# Altium PCB Yitran_IT900_Hutschiene_PIM7A_908_1_4_und_Adapter.PcbDoc
Units mil, origin at the board's own origin, x right, y up, seen from the top; angles counter-clockwise.
Board outline 3745 x 1445 mil, 2 copper layers (Top, Bottom), stack 61.811 mil thick; 33 components, 37 nets, 284 pads, 15 vias.
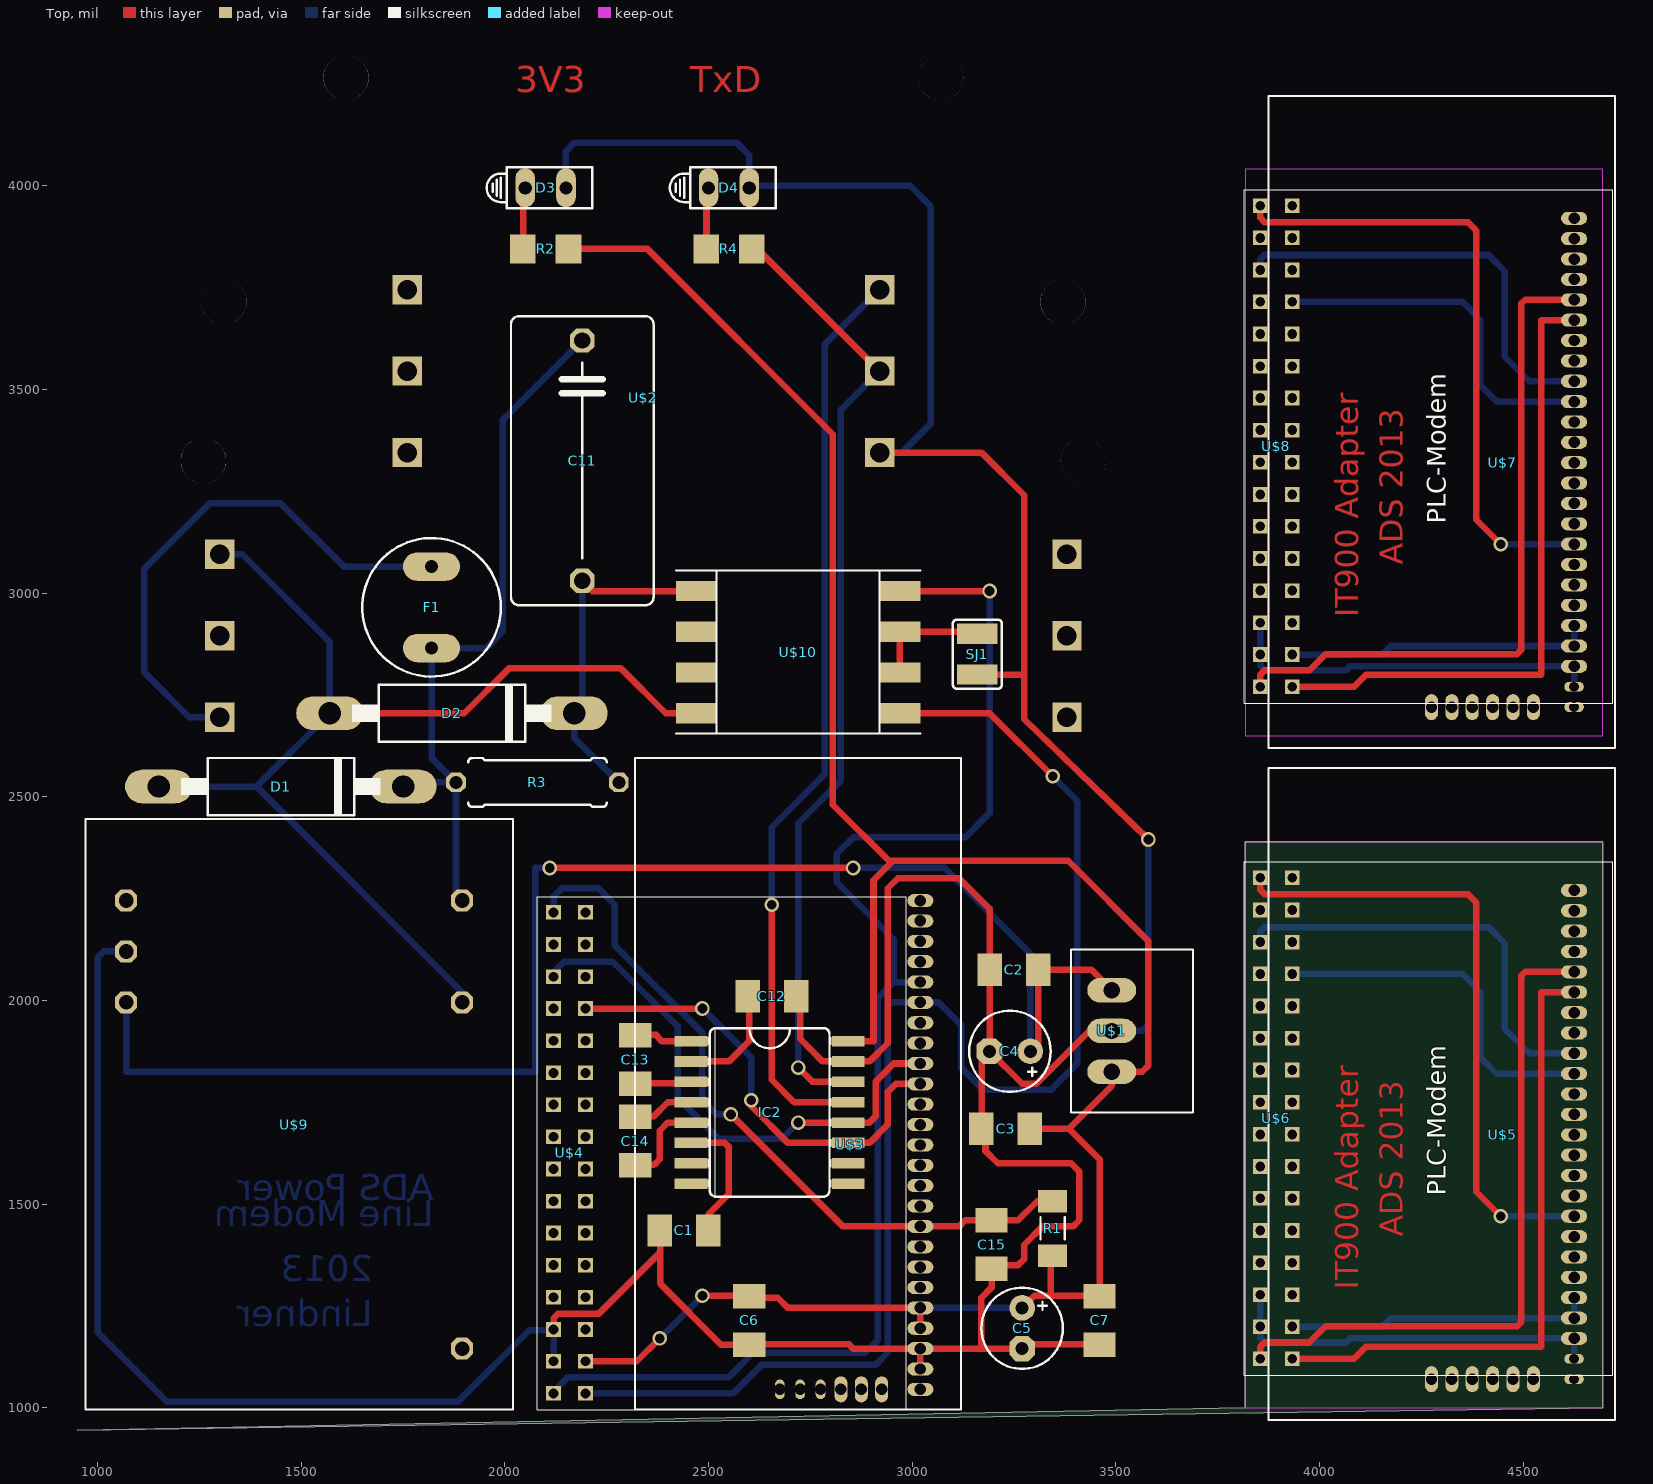
[diagram p0: Top view]
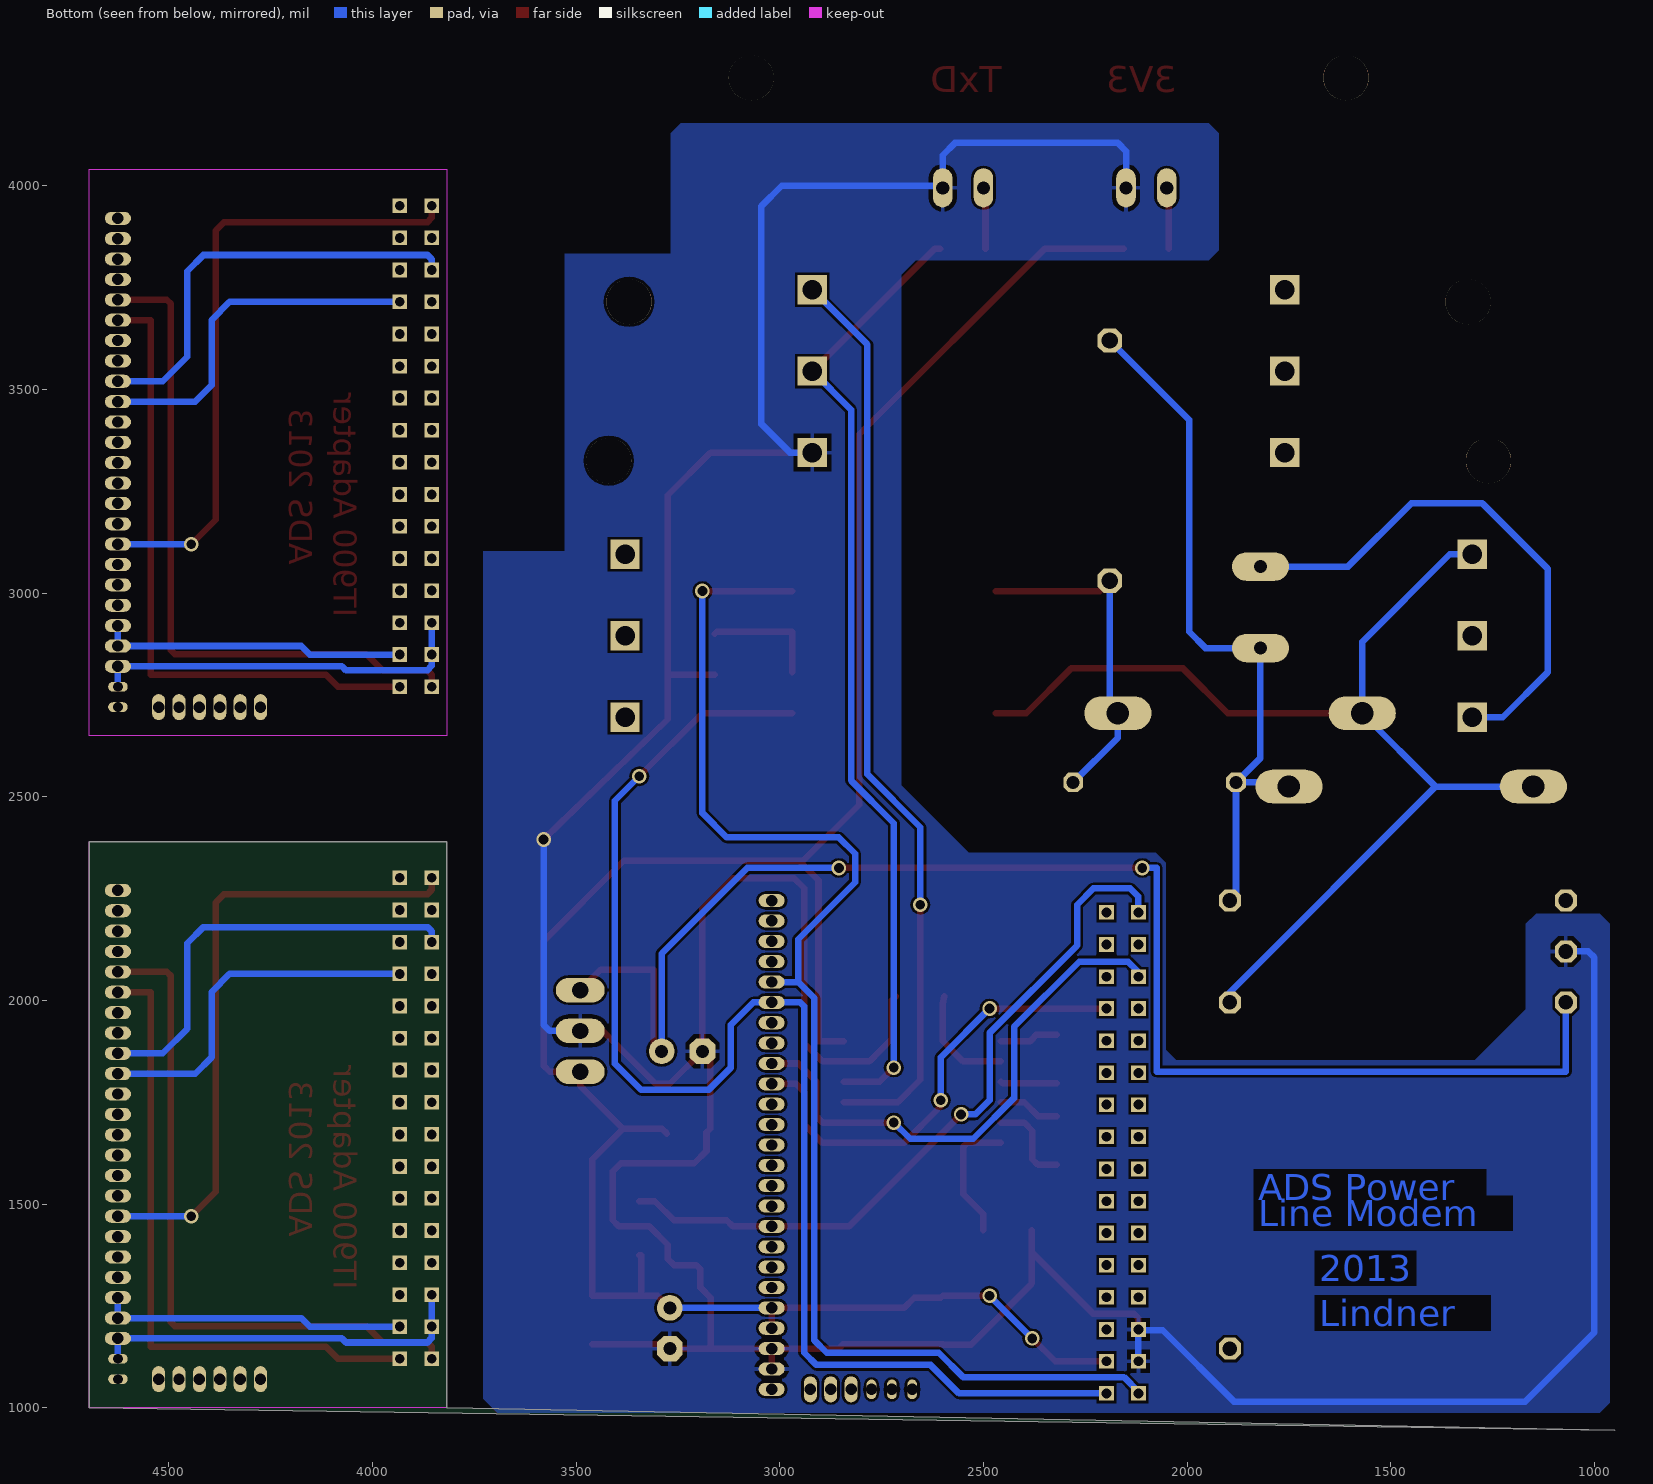
[diagram p1: Bottom view, seen from below]

## Layer stack, top to bottom
Top Solder: solder mask 0.4, Solder Resist, Dk 3.5
Top: signal copper 1.378
Dielectric 1: core 59.0551, FR-4, Dk 4.8
Bottom: signal copper 1.378
Bottom Solder: solder mask 0.4, Solder Resist, Dk 3.5

## Board outline
4695,1000 4695,2390 3818,2390 3818,1000 950,945
cut-out: 4695,2650 4695,4040 3818,4040 3818,2650

## Design rules (kind name [scope] priority, off if disabled: settings)
Clearance mdViaVia [IsVia vs IsVia] p1: gap=5.91
Clearance mdPadVia [IsPad vs IsVia] p2: gap=5.91
Clearance mdPadPad [IsPad vs IsPad] p3: gap=5.91
Clearance mdWireVia [(InLayerClass('Signal Layers') AND IsTrack) vs IsVia] p4: gap=5.91
Clearance mdWirePad [(InLayerClass('Signal Layers') AND IsTrack) vs IsPad] p5: gap=5.91
Clearance mdWireWire [(InLayerClass('Signal Layers') AND IsTrack) vs (InLayerClass('Signal Layers') AND IsTrack)] p6: gap=5.91
Clearance [All] p7: gap=5.91
HoleSize [All] p1: absolutevalues=TRUE maxlimit=100000 minlimit=11.81 maxpercent=80.000 minpercent=20.000
HoleToHoleClearance [All] p1: gap=7.87 allowstackedmicrovias=TRUE
PolygonConnect ThermalVias [IsVia] p1: connectstyle=Direct reliefconductorwidth=10 reliefentries=4 polygonreliefangle="90 Angle" airgapwidth=10
PolygonConnect [All] p2: connectstyle=Relief reliefconductorwidth=10 reliefentries=4 polygonreliefangle="90 Angle" airgapwidth=10
RoutingVias [All] p1: holewidth=28 width=50 viastyle="Through Hole" minholewidth=28 minwidth=50 maxholewidth=28 maxwidth=50
SilkToSilkClearance [All] p1 off: silktosilkclearance=10
SilkToSolderMaskClearance [IsPad] p1 off: minsilkscreentomaskgap=10 clearancetoexposedcopper=TRUE
SolderMaskExpansion [All] p1: expansion=2.95
Width [All] p1: maxlimit=100000 minlimit=5.91 preferedwidth=10
26 further rules are at their usual default settings.

## Components (designator, comment, footprint, x,y, rotation, side; value= is the part's Value field where it differs from the comment)
C1 "100n" C1206K 2440,1435 r180 top
C2 "100n" C1206K 3250,2075 r180 top
C3 "100n" C1206K 3230,1685 r180 top
C4 "4µ7" E2,5-5 3240,1875 r180 top
C5 "4µ7" E2,5-5 3270,1195 r270 top
C6 "100n" C1206K 2600,1215 r270 top
C7 "100n" C1206K 3460,1215 r270 top
C11 "" C150-091X182 2190,3325 r270 top
C12 "" C1206K 2655,2010 r0 top
C13 "100n" C1206K 2320,1855 r270 top
C14 "100n" C1206K 2320,1655 r270 top
C15 "100n" C1206K 3195,1400 r90 top
D1 "" CB417-15 1450,2525 r180 top
D2 "" CB417-15 1870,2705 r180 top
D3 "Power_3,3V rot" HLMP6 2100,3995 r0 top
D4 "TxD gruen" HLMP6 2550,3995 r0 top
F1 "1A" TR5 1820,2965 r270 top
IC2 "" SO16L 2650,1725 r270 top
R1 "100k" M1406 3345,1440 r270 top
R2 "330R" R1206 2100,3845 r0 top
R3 "470k" 0309/10 2080,2535 r0 top
R4 "330R" R1206 2550,3845 r0 top
SJ1 "" SJW 3160,2850 r270 top
U$1 "" RECOM785X 3390,1925 r270 top
U$2 "" LDG-A-12 2340,4445 r0 top
U$3 "" MODEM_FUSS 2670,1845 r90 top
U$4 "" IT900PIM7A 2080,995 r90 top
U$5 "" MODEM_FUSS_KLEINE_PINS 4225,1720 r90 top
U$6 "" IT900PIM7A 3815,1080 r90 top
U$7 "" MODEM_FUSS_KLEINE_PINS 4225,3370 r90 top
U$8 "" IT900PIM7A 3815,2730 r90 top
U$9 "" RAC04_12SA 2020,995 r90 top
U$10 "" PLC-UEBERTRAGER_V2 2720,2855 r0 top

## Footprints (in the part's own frame and the unit in brackets; to place one, negate y for a bottom-side part, rotate by r counter-clockwise, add the part's x,y. Pads: shape width x height; smd on the part's side, far side on the other; paste and mask are expansions set on the pad)
0309/10 [mil] "0309/10"
  oct 48x48 hole 32: 1(-200,0) 2(200,0)
  silkscreen extent -170,-60 170,60
C150-091X182 [mil] "C150-091X182"
  oct 60x60 hole 40: 1(-295,0) 2(295,0)
  silkscreen extent -355,-175 355,175
C1206K [mil] "C1206K"
  rect 60x79 smd: 1(-59.06,0) 2(60,0)
CB417-15 [mil] "CB417-15"
  oval 165x82.5 hole 55: A(300,0) C(-300,0)
  silkscreen extent -245,-70 245,70
E2,5-5 [mil] "E2,5-5"
  round 63 hole 32: +(-50,0)
  oct 63x63 hole 32: -(50,0)
  silkscreen extent -100,-100 100,100
HLMP6 [mil] "HLMP6"
  oval 48x96 hole 32: A(-50,0) K(50,0)
  silkscreen extent -145,-50 115,50
IT900PIM7A [mil] "IT900PIM7A"
  rect 36x36 hole 24: 1_LINE_N(40,-118.11) 2_LINE_P(40,-39.37) 3_+3_3V(119,-118.11) 4_GND(119,-39.37) 6_GND(197,-39.37) 25_TXD(985,-118.11) 28_RXD(1063,-39.37) 32_EXTRST(1221,-39.37) P$5(197,-118.11) P$7(276,-118.11) P$8(276,-39.37) P$9(355,-118.11) P$10(355,-39.37) P$11(434,-118.11) P$12(434,-39.37) P$13(512,-118.11) P$14(512,-39.37) P$15(591,-118.11) P$16(591,-39.37) P$17(670,-118.11) P$18(670,-39.37) P$19(749,-118.11) P$20(749,-39.37) P$21(827,-118.11) P$22(827,-39.37) P$23(906,-118.11) P$24(906,-39.37) P$26(985,-39.37) P$27(1063,-118.11) P$29(1142,-118.11) P$30(1142,-39.37) P$31(1221,-118.11)
  silkscreen extent 0,-906 1260,0
LDG-A-12 [mil] "LDG-A-12"
  round 111 hole 111: 1(-1080,-1120) 1(-1030,-730) 1(-730,-180) 1(730,-180) 1(1030,-730) 1(1080,-1120)
  rect 72x72 hole 48: P$1(-1040,-1750) P$2(-1040,-1550) P$3(-1040,-1350) P$4(-580,-1100) P$5(-580,-900) P$6(-580,-700) P$7(1040,-1750) P$8(1040,-1550) P$9(1040,-1350) P$10(580,-1100) P$11(580,-900) P$12(580,-700)
M1406 [mil] "M1406"
  rect 56x71 smd: 1(-66.93,0) 2(67,0)
  silkscreen extent -27,-30 27,30
MODEM_FUSS [mil] "MODEM_FUSS"
  oval 32x64 hole 28: P$1(-800,-350) P$2(-750,-350) P$3(-700,-350) P$4(-650,-350) P$5(-600,-350) P$6(-550,-350) P$7(-500,-350) P$8(-450,-350) P$9(-400,-350) P$10(-350,-350) P$11(-300,-350) P$12(-250,-350) P$13(-200,-350) P$14(-150,-350) P$15(-100,-350) P$16(-50,-350) P$17(0,-350) P$18(50,-350) P$19(100,-350) P$20(150,-350) P$21(200,-350) P$22(250,-350) P$23(300,-350) P$24(350,-350) P$25(400,-350)
  oval 48x24 hole 28: P$26(-800,-5) P$27(-800,-55) P$28(-800,-105)
  oval 64x32 hole 28: P$29(-800,-155) P$30(-800,-205) P$31(-800,-255)
  silkscreen extent -850,-450 750,350
MODEM_FUSS_KLEINE_PINS [mil] "MODEM_FUSS_KLEINE_PINS"
  oval 32x64 hole 28: 3V3(-450,-400) 3V3AN(-500,-400) 5V(550,-400) GND(-550,-400) LINE1(300,-400) LINE2(350,-400) NRESET(-250,-400) P$6(-400,-400) P$7(-350,-400) P$8(-300,-400) P$10(-200,-400) P$11(-150,-400) P$12(-100,-400) P$13(-50,-400) P$14(0,-400) P$15(50,-400) P$18(200,-400) P$19(250,-400) P$22(400,-400) P$23(450,-400) P$24(500,-400) RXD(150,-400) TXD(100,-400)
  oval 24x48 hole 24: AGND(-600,-400) P$1(-650,-400)
  oval 64x32 hole 28: P$26(-650,-300) P$27(-650,-250) P$28(-650,-200) P$29(-650,-150) P$30(-650,-100) P$31(-650,-50)
  silkscreen extent -750,-500 850,350
PLC-UEBERTRAGER_V2 [mil] "PLC-UEBERTRAGER_V2"
  rect 100x50 smd: 1LINE1(250,150) 2(250,50) 3(250,-50) 4LINE2(250,-150) 6NC(-250,50) 7NC(-250,-50) 8N(-250,-150) L5(-250,150)
  silkscreen extent -300,-200 300,200
R1206 [mil] "R1206"
  rect 63x71 smd: 1(-55.98,0) 2(56,0)
RAC04_12SA [mil] "RAC04_12SA"
  oct 54x54 hole 36: +VO(1000,950) GND(1125,950) L(1250,125) N(1000,125) NC(150,125) NC1(1250,950)
  silkscreen extent 0,0 1450,1050
RECOM785X [mil] "RECOM785X"
  oval 60x120 hole 40: GND(0,100) VIN(-100,100) VOUT(100,100)
  silkscreen extent -200,0 200,300
SJW [mil] "SJW"
  rect 50x100 smd: 1(-50,0) 2(50,0)
  silkscreen extent -85,-60 85,60
SO16L [mil] "SO16L"
  rect 26x80 smd: 1(-175,-193) 2(-125,-193) 3(-75,-193) 4(-25,-193) 5(25,-193) 6(75,-193) 7(125,-193) 8(175,-193) 9(175,193) 10(125,193) 11(75,193) 12(25,193) 13(-25,193) 14(-75,193) 15(-125,193) 16(-175,193)
  silkscreen extent -207,-152 207,152
TR5 [mil] "TR5"
  oval 70x140 hole 32: 1(-100,0) 2(100,0)
  silkscreen extent -170,-170 170,170

## Part data
C1 C2 C3 C6 C7 C12 C13 C14 C15: library part C1206K
C4 C5: library part E2,5-5
C11: library part C150-091X182
D1 D2: library part CB417-15
D3 D4: library part HLMP6
F1: library part TR5
IC2: library part SO16L
R1: library part M1406
R2 R4: library part R1206
R3: library part 0309/10
SJ1: library part SJW
U$1: library part RECOM785X
U$2: library part LDG-A-12
U$3: library part MODEM_FUSS
U$4 U$6 U$8: library part IT900PIM7A
U$5 U$7: library part MODEM_FUSS_KLEINE_PINS
U$9: library part RAC04_12SA
U$10: library part PLC-UEBERTRAGER_V2

## Via types
v1: diameter 35.81/35.81 (per signal layer), hole 24, Top to Bottom, 15 vias

## Nets (pads, with @x,y where several pads share a name; then routed paths per layer and width w, separated by ;. In a path a pad name is that pad's centre, name@x,y a point inside that pad or via, vN(x,y) a via of type N, cw(c..) or ccw(c..) an arc to the next point about the centre after c; other vN are vias at no path point)
3V3: C3.1 C5.+ C6.1 C7.1 IC2.16 R1.2 R2.2 U$1.VOUT U$3.P$4 U$3.P$5 U$4.3_+3_3V | length 5831.1
  Top w16: R2.2 2350,3845 2805,3390 2805,2480 2943,2343 2953,2343 ; U$4.3_+3_3V@2199,1114 2324,1114 v1(2380,1170) ; v1(2485,1275) 2600,1275 2605,1270 2670,1270 2695,1245 U$3.P$5 U$3.P$4 ; IC2.16 2905,1900 2905,2295 2953,2343 ; C5.+ 3300,1275 3340,1275 ; C3.1@3277,1673 3290,1685 3385,1685 ; R1.2@3345,1374 3340,1374 3340,1275 ; 2953,2343 3383,2343 3580,2145 3580,1840 3565,1825 U$1.VOUT 3490,1790 3385,1685 ; 3340,1275 3460,1275 3460,1610 3385,1685
  Bottom w16: v1(2380,1170) v1(2485,1275) ; U$3.P$5 C5.+
EXTRST: C15.2 R1.1 U$3.P$9 U$4.32_EXTRST | length 1797
  Top w16: v1(2555,1720) 2830,1445 U$3.P$9 3115,1445 3130,1460 C15.2 3196,1460 3260,1460 3307,1507 R1.1@3345,1507
  Bottom w16: U$4.32_EXTRST@2120,2216 2120,2217 2120,2255 2140,2275 2230,2275 2270,2235 2270,2135 2485,1920 2485,1755 2520,1720 v1(2555,1720)
GND: C1.2 C2.2 C3.2 C4.- C5.- C6.2 C7.2 C12.2 C15.1 D3.K D4.K IC2.15 SJ1.2 U$1.GND U$2.P$10 U$3.P$2 U$3.P$3 U$4.4_GND U$4.6_GND U$9.GND | length 10825.8
  Top w16: U$4.6_GND@2120,1192 2120,1193 2120,1220 2130,1230 2230,1230 2381,1381 2381,1435 2381,1305 2530,1155 C6.2 2600,1156 2845,1156 2855,1145 U$3.P$3 ; C12.2 2725,2000 2725,1906 2780,1850 IC2.15 2895,1850 2940,1895 2940,2275 2965,2300 3115,2300 3190,2225 3190,2076 3191,2075 3191,1876 C4.- ; U$2.P$10 3170,3345 3275,3240 3275,2800 ; U$3.P$2 U$3.P$3 ; SJ1.2@3175,2800 SJ1.2 3275,2800 ; C7.2@3460,1156 3281,1156 C5.- 3175,1145 ; U$1.GND 3435,1925 3305,1795 3270,1795 C4.- ; v1(3580,2395) 3275,2690 3275,2800 ; U$3.P$3 3175,1145 ; 3175,1145 3170,1150 3170,1270 3195,1295 3195,1341 3205,1350 3260,1350 3275,1365 3275,1400 3320,1445 3395,1445 3410,1460 3410,1580 3390,1600 3210,1600 3180,1630 3180,1676 3171,1685 3171,1856 C4.-
  Bottom w16: U$9.GND 1015,2120 1000,2105 1000,1185 1170,1015 1885,1015 2060,1190 2118,1190 2120,1192 U$4.4_GND@2120,1114 ; D3.K 2150,4085 2170,4105 2570,4105 2600,4075 D4.K 2605,4000 2995,4000 3045,3950 3045,3415 2975,3345 U$2.P$10 ; U$1.GND 3565,1925 3580,1940 v1(3580,2395)
L: C11.1 D1.C F1.2 R3.1 U$9.L | length 1772.5
  Bottom w16: D1.C 1760,2535 R3.1 ; U$9.L 1880,2260 R3.1 ; C11.1 1995,3425 1995,2905 1955,2865 F1.2 1820,2595 R3.1
LINE1: U$3.P$20 U$4.1_LINE_N U$10.4LINE2 | length 3448.1
  Top w16: U$10.4LINE2 3190,2705 v1(3345,2550)
  Bottom w16: U$4.1_LINE_N@2199,1035 2560,1035 2630,1105 2910,1105 2940,1135 2940,1985 2950,1995 U$3.P$20 3065,1995 3120,1940 3120,1835 3175,1780 3340,1780 3405,1845 3405,2490 v1(3345,2550)
LINE2: U$3.P$21 U$4.2_LINE_P U$10.1LINE1 | length 3367.8
  Top w16: U$10.1LINE1 v1(3190,3005)
  Bottom w16: U$4.2_LINE_P@2120,1035 2120,1040 2155,1075 2550,1075 2610,1135 2885,1135 2915,1165 2915,2005 2955,2045 ; U$3.P$21 2955,2045 ; v1(3190,3005) 3190,2460 3130,2400 2855,2400 2815,2360 2815,2290 2955,2150 2955,2045
N: D1.A D2.A U$2.P$3 U$9.N U$10.8N | length 2758.9
  Top w16: D2.A 1900,2705 2010,2815 2285,2815 2395,2705 U$10.8N
  Bottom w16: D1.A 1390,2525 ; U$2.P$3 1355,3095 1570,2880 D2.A 1390,2525 ; U$9.N 1895,2020 1390,2525
N$1: F1.1 U$2.P$1 | length 1321
  Bottom w16: U$2.P$1 1225,2695 1115,2805 1115,3060 1275,3220 1450,3220 1605,3065 F1.1
N$2: C11.2 D2.C R3.2 U$10.L5 | length 839.2
  Top w16: C11.2 2215,3005 U$10.L5
  Bottom w16: C11.2 2190,2725 D2.C 2170,2645 R3.2
N$3: C2.1 C4.+ U$1.VIN U$9.+VO | length 3626
  Top w16: v1(2110,2325) v1(2855,2325) ; C4.+ 3310,1895 3310,2075 3440,2075 U$1.VIN
  Bottom w16: U$9.+VO 1070,1825 2075,1825 2075,2325 v1(2110,2325) ; v1(2855,2325) 3080,2325 3290,2115 C4.+
N$4: D3.A R2.1 | length 152.1
  Top w16: R2.1@2045,3845 2045,3990 D3.A
N$5: C12.1 IC2.2 | length 274.1
  Top w16: IC2.2 2550,1850 2600,1900 2600,1991 C12.1@2596,2010
N$6: U$5.3V3 U$5.3V3AN U$6.3_+3_3V | length 749.7
  Bottom w16: U$6.3_+3_3V@3934,1199 4154,1199 4175,1220 U$5.3V3AN U$5.3V3
N$7: C13.1 IC2.1 | length 143.5
  Top w16: C13.1@2320,1915 2371,1915 2385,1900 IC2.1
N$8: C13.2 IC2.3 | length 138.7
  Top w16: C13.2@2320,1796 2453,1796 IC2.3
N$9: C14.1 IC2.4 | length 151.5
  Top w16: C14.1@2320,1715 2365,1715 2400,1750 IC2.4
N$10: C14.2 IC2.5 | length 221.1
  Top w16: C14.2@2320,1596 2366,1596 2380,1610 2380,1680 2400,1700 IC2.5
N$11: U$5.LINE1 U$6.1_LINE_N | length 1573.4
  Top w16: U$6.1_LINE_N@3934,1120 4085,1120 4115,1150 4545,1150 4545,2020 U$5.LINE1
N$12: C1.1 IC2.6 | length 322.9
  Top w16: IC2.6 2540,1650 2550,1640 2550,1525 2500,1475 C1.1@2500,1435
N$13: D4.A R4.1 | length 152.1
  Top w16: R4.1@2495,3845 2495,3990 D4.A
N$14: SJ1.1 U$10.2 U$10.3 | length 292.1
  Top w16: U$10.3 U$10.2 3155,2905 SJ1.1
N$15: U$5.LINE2 U$6.2_LINE_P | length 1679
  Top w16: U$6.2_LINE_P@3855,1120 3855,1150 3865,1160 3975,1160 4015,1200 4485,1200 4495,1210 4495,2060 4505,2070 U$5.LINE2
N$16: U$5.AGND U$5.GND U$6.4_GND U$6.6_GND | length 935
  Bottom w16: U$6.6_GND@3855,1277 3855,1199 3855,1171 3865,1160 4065,1160 4075,1170 U$5.GND U$5.AGND
N$17: U$5.TXD U$6.25_TXD | length 886.5
  Bottom w16: U$6.25_TXD@3934,2065 4351,2065 4395,2020 4395,1860 4435,1820 U$5.TXD
N$18: U$5.RXD U$6.28_RXD | length 1052.6
  Bottom w16: U$6.28_RXD@3855,2143 3855,2170 3865,2180 4415,2180 4455,2140 4455,1930 4515,1870 U$5.RXD
N$19: U$5.NRESET U$6.32_EXTRST | length 1548
  Top w16: U$6.32_EXTRST@3855,2301 3855,2271 3865,2260 4365,2260 4385,2240 4385,1530 v1(4445,1470)
  Bottom w16: v1(4445,1470) U$5.NRESET
N$20: U$7.3V3 U$7.3V3AN U$8.3_+3_3V | length 749.7
  Bottom w16: U$8.3_+3_3V@3934,2849 4154,2849 4175,2870 U$7.3V3AN U$7.3V3
N$21: U$7.LINE1 U$8.1_LINE_N | length 1573.4
  Top w16: U$8.1_LINE_N@3934,2770 4085,2770 4115,2800 4545,2800 4545,3670 U$7.LINE1
N$22: U$7.LINE2 U$8.2_LINE_P | length 1679
  Top w16: U$8.2_LINE_P@3855,2770 3855,2800 3865,2810 3975,2810 4015,2850 4485,2850 4495,2860 4495,3710 4505,3720 U$7.LINE2
N$23: U$7.AGND U$7.GND U$8.4_GND U$8.6_GND | length 935
  Bottom w16: U$8.6_GND@3855,2927 3855,2849 3855,2821 3865,2810 4065,2810 4075,2820 U$7.GND U$7.AGND
N$24: U$7.TXD U$8.25_TXD | length 886.5
  Bottom w16: U$8.25_TXD@3934,3715 4351,3715 4395,3670 4395,3510 4435,3470 U$7.TXD
N$25: U$7.RXD U$8.28_RXD | length 1052.6
  Bottom w16: U$8.28_RXD@3855,3793 3855,3820 3865,3830 4415,3830 4455,3790 4455,3580 4515,3520 U$7.RXD
N$26: U$7.NRESET U$8.32_EXTRST | length 1548
  Top w16: U$8.32_EXTRST@3855,3951 3855,3921 3865,3910 4365,3910 4385,3890 4385,3180 v1(4445,3120)
  Bottom w16: v1(4445,3120) U$7.NRESET
RX: IC2.12 U$3.P$17 U$4.28_RXD | length 1331.5
  Top w16: v1(2720,1700) IC2.12 2895,1700 2910,1715 2910,1800 2955,1845 U$3.P$17
  Bottom w16: U$4.28_RXD@2120,2058 2120,2070 2145,2095 2265,2095 2425,1935 2425,1760 2525,1660 2680,1660 v1(2720,1700)
RXD: IC2.13 U$2.P$12 | length 2260.5
  Top w16: v1(2655,2235) 2655,1805 2710,1750 IC2.13
  Bottom w16: v1(2655,2235) 2655,2425 2785,2555 2785,3610 U$2.P$12
TX: IC2.11 U$3.P$16 U$4.25_TXD | length 1134.9
  Top w16: U$4.25_TXD@2199,1980 v1(2485,1980) ; v1(2605,1755) 2605,1740 2695,1650 IC2.11 2895,1650 2940,1695 2940,1775 2960,1795 U$3.P$16
  Bottom w16: v1(2485,1980) 2605,1860 v1(2605,1755)
TXD: IC2.14 R4.2 U$2.P$11 | length 2368.6
  Top w16: R4.2 2620,3845 U$2.P$11 ; v1(2720,1835) 2755,1800 IC2.14
  Bottom w16: v1(2720,1835) 2720,2435 2825,2540 2825,3450 U$2.P$11
pads on no net: IC2.7 IC2.8 IC2.9 IC2.10 U$2.1 U$2.P$2 U$2.P$4 U$2.P$5 U$2.P$6 U$2.P$7 U$2.P$8 U$2.P$9 U$3.P$1 U$3.P$6 U$3.P$7 U$3.P$8 U$3.P$10 U$3.P$11 U$3.P$12 U$3.P$13 U$3.P$14 U$3.P$15 U$3.P$18 U$3.P$19 U$3.P$22 U$3.P$23 U$3.P$24 U$3.P$25 U$3.P$26 U$3.P$27 U$3.P$28 U$3.P$29 U$3.P$30 U$3.P$31 U$4.P$5 U$4.P$7 U$4.P$8 U$4.P$9 U$4.P$10 U$4.P$11 U$4.P$12 U$4.P$13 U$4.P$14 U$4.P$15 U$4.P$16 U$4.P$17 U$4.P$18 U$4.P$19 U$4.P$20 U$4.P$21 U$4.P$22 U$4.P$23 U$4.P$24 U$4.P$26 U$4.P$27 U$4.P$29 U$4.P$30 U$4.P$31 U$5.5V U$5.P$1 U$5.P$6 U$5.P$7 U$5.P$8 U$5.P$10 U$5.P$11 U$5.P$12 U$5.P$13 U$5.P$14 U$5.P$15 U$5.P$18 U$5.P$19 U$5.P$22 U$5.P$23 U$5.P$24 U$5.P$26 U$5.P$27 U$5.P$28 U$5.P$29 U$5.P$30 U$5.P$31 U$6.P$5 U$6.P$7 U$6.P$8 U$6.P$9 U$6.P$10 U$6.P$11 U$6.P$12 U$6.P$13 U$6.P$14 U$6.P$15 U$6.P$16 U$6.P$17 U$6.P$18 U$6.P$19 U$6.P$20 U$6.P$21 U$6.P$22 U$6.P$23 U$6.P$24 U$6.P$26 U$6.P$27 U$6.P$29 U$6.P$30 U$6.P$31 U$7.5V U$7.P$1 U$7.P$6 U$7.P$7 U$7.P$8 U$7.P$10 U$7.P$11 U$7.P$12 U$7.P$13 U$7.P$14 U$7.P$15 U$7.P$18 U$7.P$19 U$7.P$22 U$7.P$23 U$7.P$24 U$7.P$26 U$7.P$27 U$7.P$28 U$7.P$29 U$7.P$30 U$7.P$31 U$8.P$5 U$8.P$7 U$8.P$8 U$8.P$9 U$8.P$10 U$8.P$11 U$8.P$12 U$8.P$13 U$8.P$14 U$8.P$15 U$8.P$16 U$8.P$17 U$8.P$18 U$8.P$19 U$8.P$20 U$8.P$21 U$8.P$22 U$8.P$23 U$8.P$24 U$8.P$26 U$8.P$27 U$8.P$29 U$8.P$30 U$8.P$31 U$9.NC U$9.NC1 U$10.6NC U$10.7NC

## Polygon pours and split planes (outlines as drawn)
GND on Bottom "Bottom-GND" (solid, remove dead copper, pour order 2): 962,2188.31 962,1011.69 986.69,987 3693.31,987 3728,1021.69 3728,3103 3528,3103 3528,3833 3268,3833 3268,4128.31 3243.31,4153 1946.69,4153 1922,4128.31 1922,3841.69 1946.69,3817 2666.69,3817 2694.34,3789.34 2702,3781.69 2702,2528.31 2554.34,2380.66 2536.69,2363 2076.69,2363 2052,2338.31 2052,1878.31 2026.69,1853 1293.31,1853 1168,1978.31 1168,2188.31 1143.31,2213 986.69,2213

## Keep-outs
Keep-Out Layer:
  lines w0: 3818,1000 3818,2390 4695,2390 4695,1000 3818,1000

## Other copper
Top:
  text "3V3" at 2025,4230 h64.6
  text "TxD" at 2455,4230 h64.6
  text "ADS 2013" at 4205,3070 h56.1 r90
  text "IT900 Adapter" at 4095,2940 h56.1 r90
  text "ADS 2013" at 4205,1420 h56.1 r90
  text "IT900 Adapter" at 4095,1290 h56.1 r90
Bottom:
  text "ADS Power" at 1825,1509.6 h64.6
  text "Line Modem" at 1825,1445 h64.6
  text "2013" at 1675,1310 h64.6
  text "Lindner" at 1675,1200 h64.6

## Silkscreen, mask and mechanical layers (free items; w line width, h text height)
Dimension:
  lines w0: 3818,1000 3818,2390 4695,2390 4695,1000 3818,1000 ; 3818,2650 3818,4040 4695,4040 4695,2650 3818,2650

## Text inside footprints (layer, text, board x,y; h text height)
C1: tNames ">NAME" at 2502.99,1391 h62 r180; tValues ">VALUE" at 2502.99,1517.68 h62 r180
C2: tNames ">NAME" at 3312.99,2031 h62 r180; tValues ">VALUE" at 3312.99,2157.68 h62 r180
C3: tNames ">NAME" at 3292.99,1641 h62 r180; tValues ">VALUE" at 3292.99,1767.68 h62 r180
C4: tNames ">NAME" at 3145,1825 h77.5 r180; tValues ">VALUE" at 3145,1970 h77.5 r180
C5: tNames ">NAME" at 3320,1100 h77.5 r270; tValues ">VALUE" at 3175,1100 h77.5 r270
C6: tNames ">NAME" at 2644,1277.99 h62 r270; tValues ">VALUE" at 2517.32,1277.99 h62 r270
C7: tNames ">NAME" at 3504,1277.99 h62 r270; tValues ">VALUE" at 3377.32,1277.99 h62 r270
C11: tNames ">NAME" at 2380,3660 h77.5 r270; tValues ">VALUE" at 2090,3460 h77.5 r270
C12: tNames ">NAME" at 2592.01,2054 h62; tValues ">VALUE" at 2592.01,1927.32 h62
C13: tNames ">NAME" at 2364,1917.99 h62 r270; tValues ">VALUE" at 2237.32,1917.99 h62 r270
C14: tNames ">NAME" at 2364,1717.99 h62 r270; tValues ">VALUE" at 2237.32,1717.99 h62 r270
C15: tNames ">NAME" at 3151,1337.01 h62 r90; tValues ">VALUE" at 3277.68,1337.01 h62 r90
D1: tNames ">NAME" at 1630,2440 h77.5 r180; tValues ">VALUE" at 1560,2580 h77.5 r180
D2: tNames ">NAME" at 2050,2620 h77.5 r180; tValues ">VALUE" at 1980,2760 h77.5 r180
D3: tNames ">NAME" at 2235,4000 h77.5; tValues ">VALUE" at 2235,3940 h77.5
D4: tNames ">NAME" at 2685,4000 h77.5; tValues ">VALUE" at 2685,3940 h77.5
F1: tNames ">NAME" at 2020,3065 h77.5 r270; tValues ">VALUE" at 1720,3065 h77.5 r270
IC2: tNames ">NAME" at 2510,1945 h77.5; tValues ">VALUE" at 2620,1865 h77.5 r270
R1: tNames ">NAME" at 3390,1505 h77.5 r270; tValues ">VALUE" at 3250,1505 h77.5 r270
R2: tNames ">NAME" at 2045,3890 h77.5; tValues ">VALUE" at 2045,3750 h77.5
R3: tNames ">NAME" at 1915,2610 h77.5; tValues ">VALUE" at 1955,2508 h77.5
R4: tNames ">NAME" at 2495,3890 h77.5; tValues ">VALUE" at 2495,3750 h77.5
SJ1: tNames ">NAME" at 3230,2935 h77.5 r270; tValues ">VALUE" at 3160,2810 h1.55 r270
U$5: Top Overlay "PLC-Modem" at 4325,1520 h77.5 r90
U$7: Top Overlay "PLC-Modem" at 4325,3170 h77.5 r90